# Altium PCB PCB1.PcbDoc
Units mm, origin at the board's own origin, x right, y up, seen from the top; angles counter-clockwise.
Board outline 75.06 x 51.94 mm, 2 copper layers (Top Layer, Bottom Layer); 23 components, 26 nets, 108 pads, 0 vias.
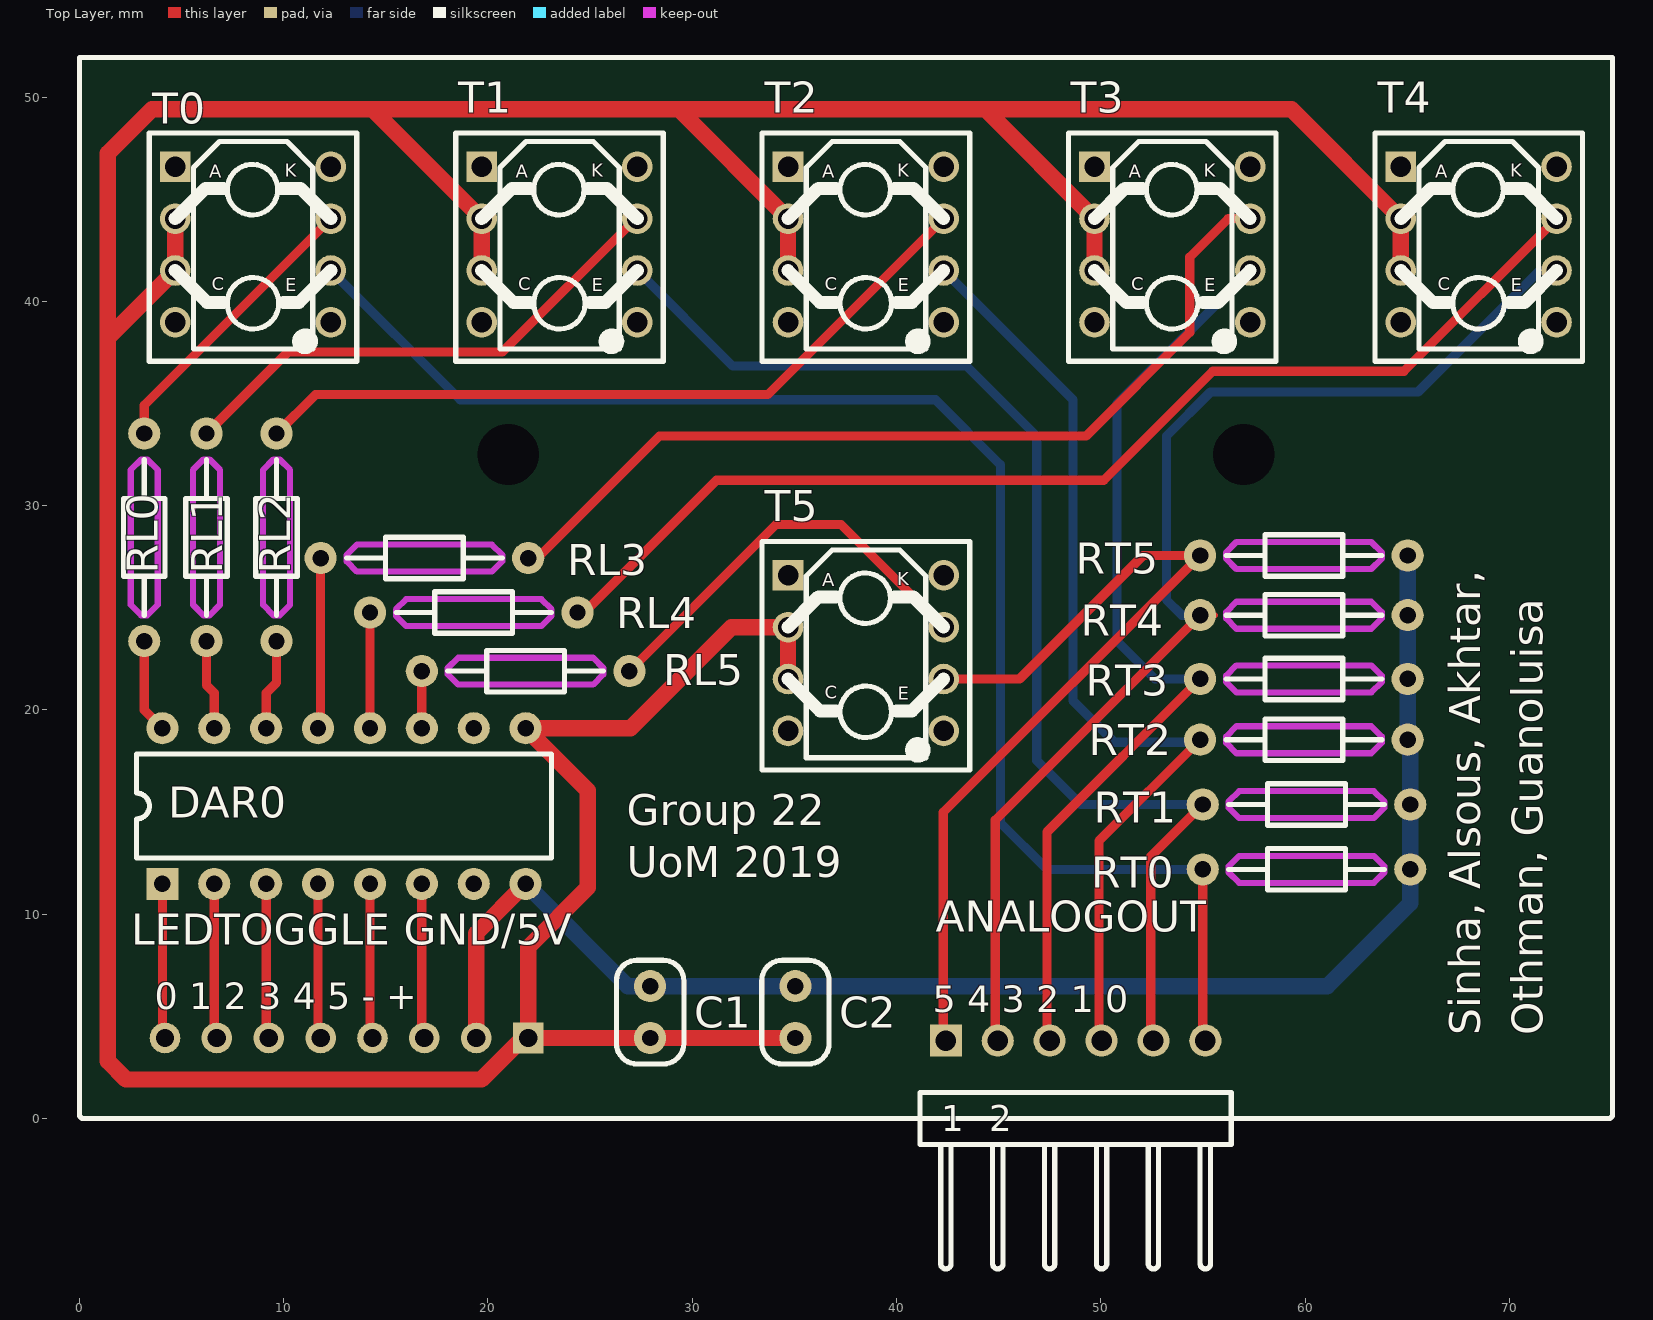
[diagram p0: Top Layer view]
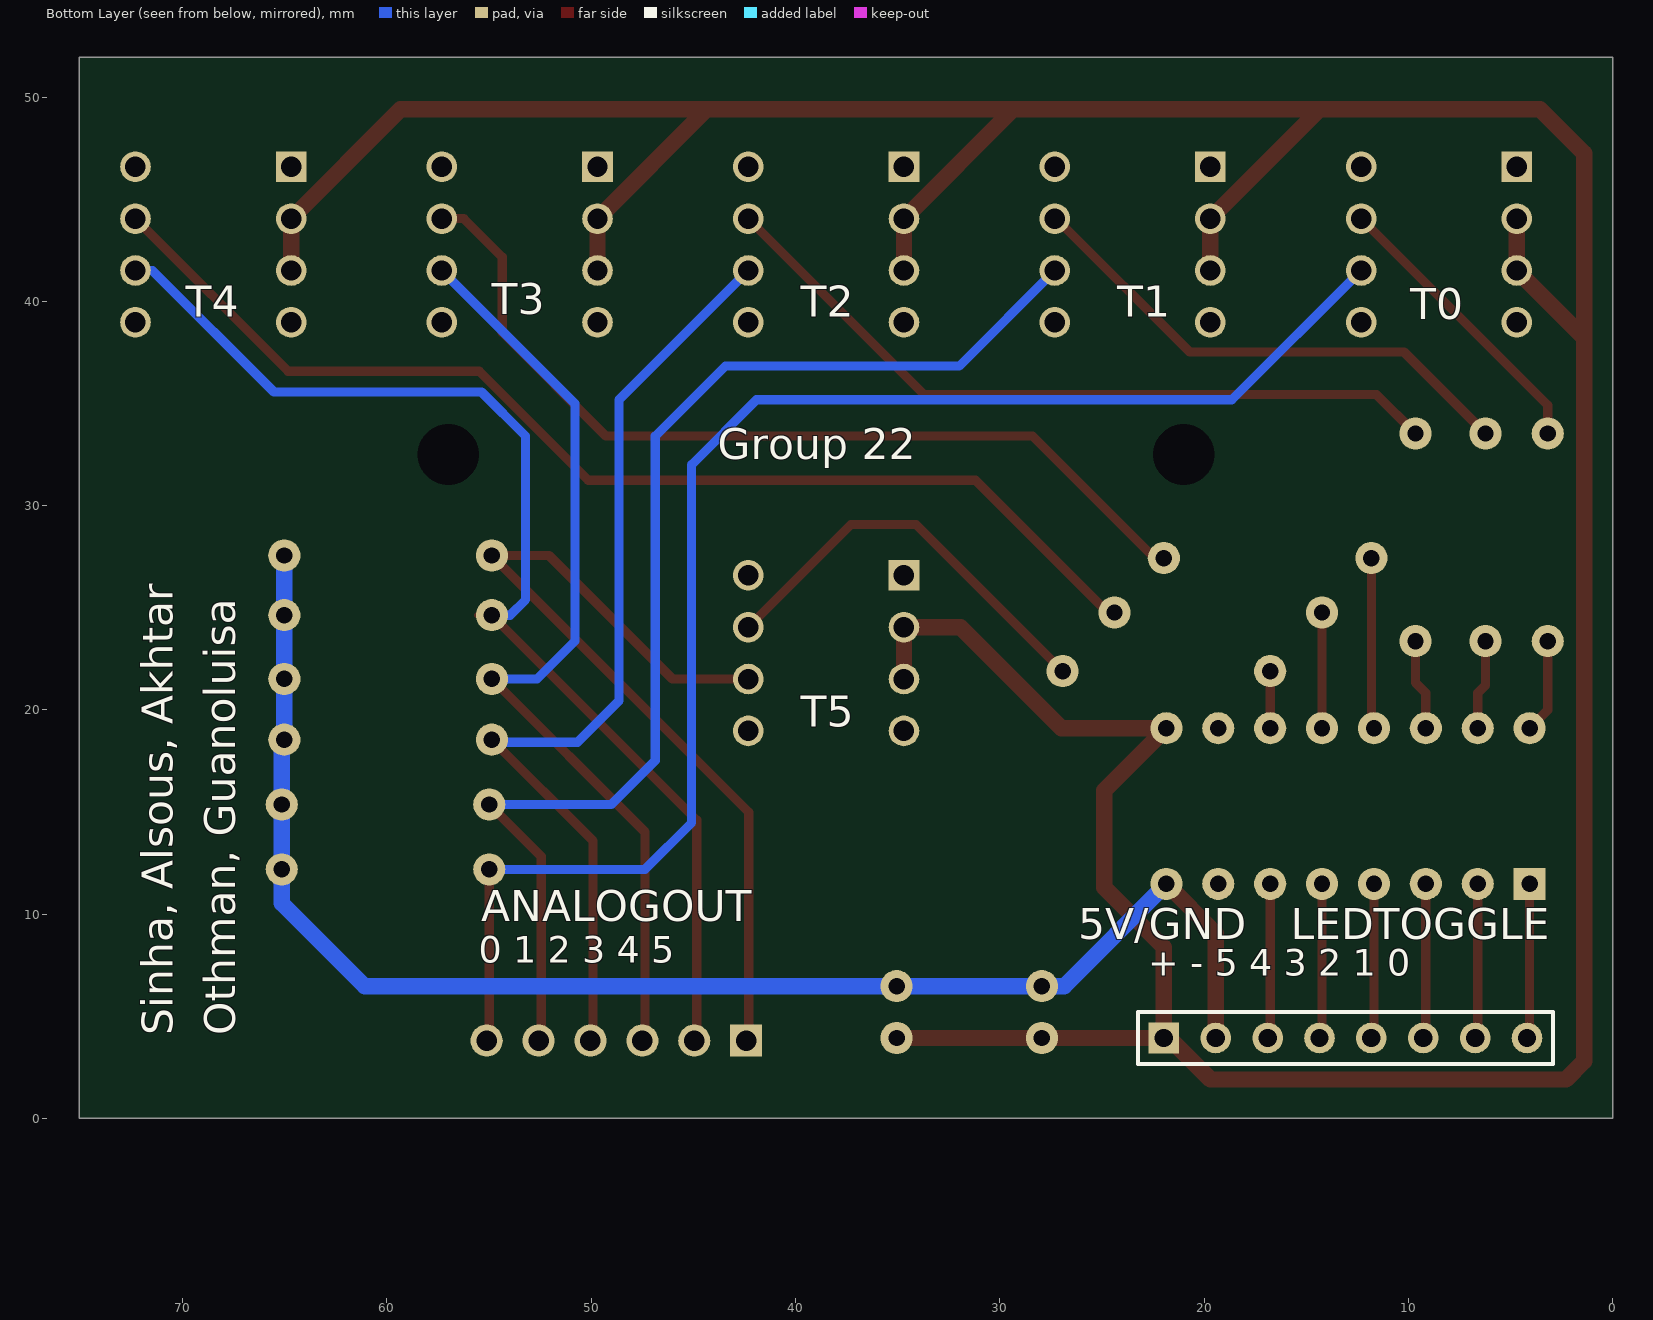
[diagram p1: Bottom Layer view, seen from below]
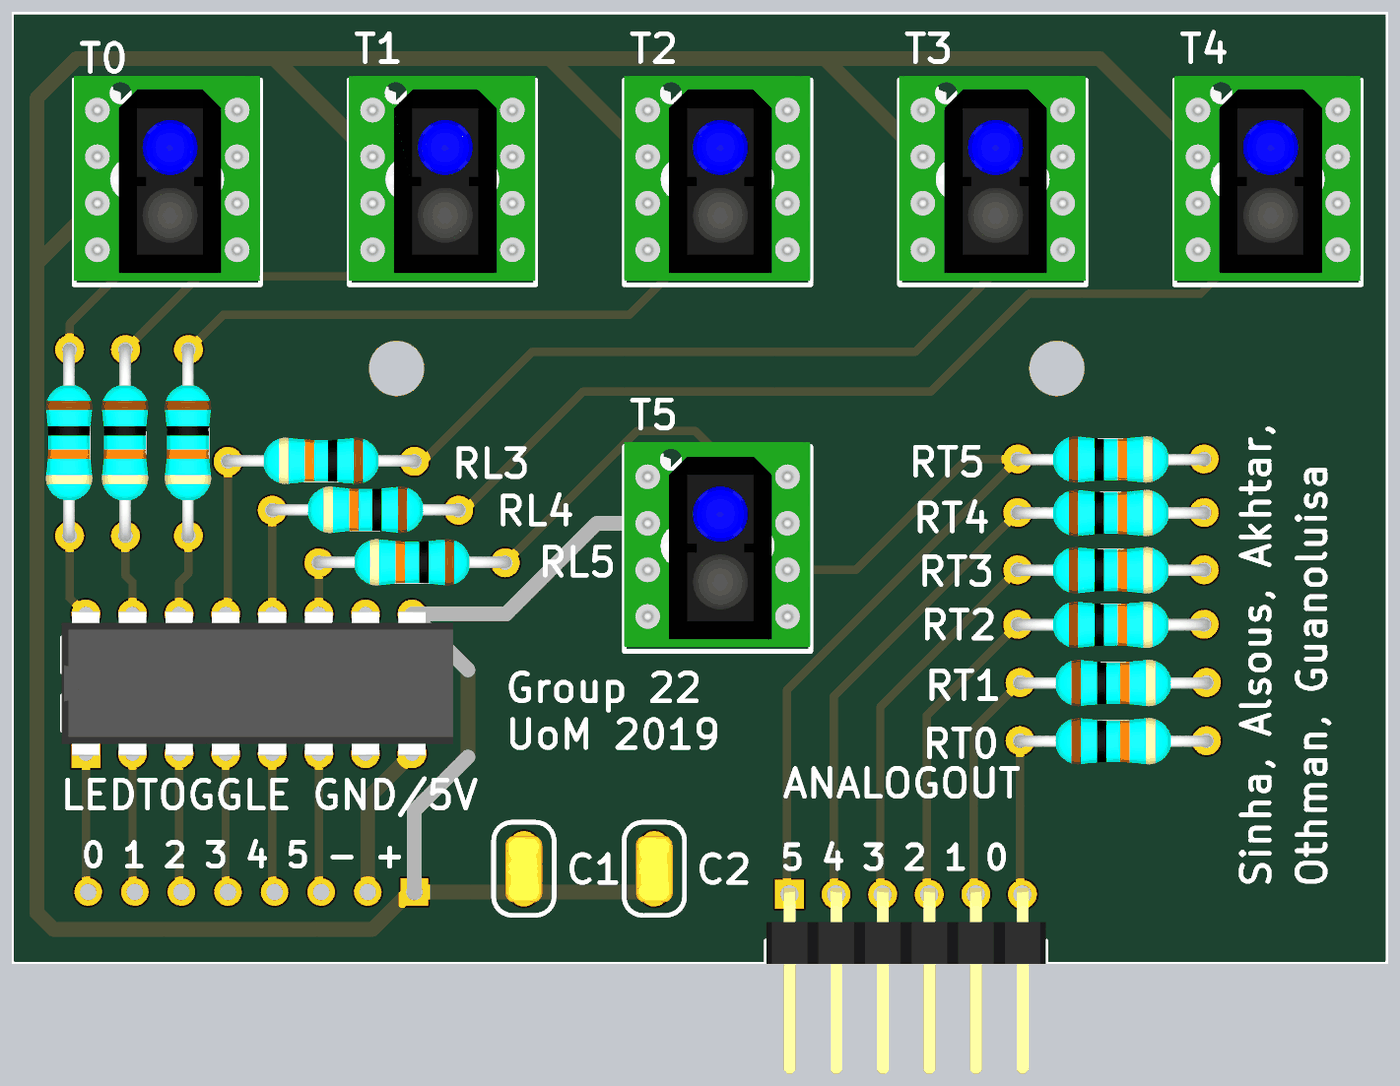
[diagram p2: 3D render of the assembled board from above, using the file's embedded part models]

## Layer stack, top to bottom
Top Solder: solder mask 0.0102, Solder Resist, Dk 3.5
Top Layer: signal copper 0.0356
Dielectric 1: dielectric 0.32, FR-4, Dk 4.8
Bottom Layer: signal copper 0.0356
Bottom Solder: solder mask 0.0102, Solder Resist, Dk 3.5

## Board outline
0,0 75.057,0 75.057,51.943 0,51.943

## Design rules (kind name [scope] priority, off if disabled: settings)
Clearance [All] p1: gap=0.254 ignorepadtopadclearanceinfootprint=FALSE except(0: Arc-Hole Track-Hole SMDPad-Hole THPad-Hole Via-Hole Fill-Hole Poly-Hole Region-Hole Text-Hole)
PolygonConnect [All] p1: connectstyle=Relief reliefconductorwidth=0.254 reliefentries=4 polygonreliefangle="90 Angle" airgapwidth=0.254
RoutingVias [All] p1: holewidth=0.711 width=1.27 viastyle="Through Hole" minholewidth=0.711 minwidth=1.27 maxholewidth=0.711 maxwidth=1.27
SolderMaskExpansion [All] p1: expansion=0.102
Width [All] p1: maxlimit=0.8 minlimit=0.254 preferedwidth=0.3 minimp=50.000000 maximp=50.000000 favimp=50.000000
30 further rules are at their usual default settings.

## Components (designator, comment, footprint, x,y, rotation, side; value= is the part's Value field where it differs from the comment)
ANALOGOUT "Debug Interface" PROGRAMMING-HEADER-MICRO 42.418,3.81 r0 top
C1 "100nF" CAPACITOR_100NF_TH 27.94,3.937 r90 top
C2 "100nF" CAPACITOR_100NF_TH 35.052,3.937 r90 top
DAR0 "ULN2003" "DILP-16(300) - 3D" 4.064,11.484 r90 top
LEDTOGGLE "Debug Interface" HDR1X8 21.971,3.937 r180 bottom
RL0 "Resistor (IO board)" RESISTOR_10K_TH_QW 3.175,23.368 r90 top
RL1 "Resistor (IO board)" RESISTOR_10K_TH_QW 6.223,23.368 r90 top
RL2 "Resistor (IO board)" RESISTOR_10K_TH_QW 9.652,23.368 r90 top
RL3 "Resistor (IO board)" RESISTOR_10K_TH_QW 11.811,27.432 r0 top
RL4 "Resistor (IO board)" RESISTOR_10K_TH_QW 14.224,24.765 r0 top
RL5 "Resistor (IO board)" RESISTOR_10K_TH_QW 16.764,21.898 r0 top
RT0 "Resistor (IO board)" RESISTOR_10K_TH_QW 65.151,12.192 r180 top
RT1 "Resistor (IO board)" RESISTOR_10K_TH_QW 65.151,15.367 r180 top
RT2 "Resistor (IO board)" RESISTOR_10K_TH_QW 65.024,18.542 r180 top
RT3 "Resistor (IO board)" RESISTOR_10K_TH_QW 65.024,21.517 r180 top
RT4 "Resistor (IO board)" RESISTOR_10K_TH_QW 65.024,24.638 r180 top
RT5 "Resistor (IO board)" RESISTOR_10K_TH_QW 65.024,27.559 r180 top
T0 "TCRT5000(On PCB)" "TCRT5000 Breakout" 6.491,44.706 r0 top
T1 "TCRT5000(On PCB)" "TCRT5000 Breakout" 21.491,44.706 r0 top
T2 "TCRT5000(On PCB)" "TCRT5000 Breakout" 36.491,44.706 r0 top
T3 "TCRT5000(On PCB)" "TCRT5000 Breakout" 51.491,44.706 r0 top
T4 "TCRT5000(On PCB)" "TCRT5000 Breakout" 66.491,44.706 r0 top
T5 "TCRT5000(On PCB)" "TCRT5000 Breakout" 36.491,24.706 r0 top

## Footprints (in the part's own frame and the unit in brackets; to place one, negate y for a bottom-side part, rotate by r counter-clockwise, add the part's x,y. Pads: shape width x height; smd on the part's side, far side on the other; paste and mask are expansions set on the pad)
CAPACITOR_100NF_TH [mil]
  round 62 hole 31.5: 1(0,0) 2(100,0)
  silkscreen extent -50,-65 150,65, body extent -22,-39 121,39, height 174
"DILP-16(300) - 3D" [mil]
  rect 62x62 hole 31.5: 1(0,0)
  round 62 hole 31.5: 2(0,-100) 3(0,-200) 4(0,-300) 5(0,-400) 6(0,-500) 7(0,-600) 8(0,-700) 9(300,-700) 10(300,-600) 11(300,-500) 12(300,-400) 13(300,-300) 14(300,-200) 15(300,-100) 16(300,0)
  silkscreen extent 50,-750 250,50, body extent -4,-789 306,53, height 200
HDR1X8 [mm] "Connector; Header; 8 Position"
  rect 1.5x1.5 hole 0.9: 1(0,0)
  round 1.5 hole 0.9: 2(2.54,0) 3(5.08,0) 4(7.62,0) 5(10.16,0) 6(12.7,0) 7(15.24,0) 8(17.78,0)
  silkscreen extent -1.27,-1.27 19.05,1.27
PROGRAMMING-HEADER-MICRO [mil]
  rect 62x62 hole 39.37: 1(0,0)
  round 62 hole 39.37: 2(100,0) 3(200,0) 4(300,0) 5(400,0) 6(500,0)
  silkscreen extent -50,-440 550,-100, body extent -50,-385 550,13, height 99
RESISTOR_10K_TH_QW [mil]
  round 62 hole 31.5: 1(0,0) 2(400,0)
  Top Layer keep-out lines w12: 70,26 50,6 50,-6 70,-26 330,-26 350,-6 350,6 330,26 70,26
  silkscreen extent 50,-40 350,40, body extent -12,-49 412,51, height 103
"TCRT5000 Breakout" [mm]
  rect 1.5x1.5 hole 1: 1(-1.799,1.884)
  round 1.5 hole 1: 2(-1.799,-0.656) 3(-1.799,-3.196) 4(-1.799,-5.736) 5(5.821,-5.736) 6(5.821,-3.196) 7(5.821,-0.656) 8(5.821,1.884)
  silkscreen extent -3.07,-7.64 7.09,3.54, body extent -3.09,-7.41 7.09,3.77, height 10.11

## Part data
ANALOGOUT: library part "Header 6", "Header, 6-Pin", LatestRevisionDate=17-Jul-2002, LatestRevisionNote="Re-released for DXP Platform.", Publisher="Altium Limited"
C1 C2: library part "Capacitor(IO Board)", "Capacitor 100nF"
DAR0: "Darlington Transistor Array", Supplier Part Number 1=1470512, Supplier 1=Farnell
LEDTOGGLE: library part "Header 8", "Header, 8-Pin", LatestRevisionDate=17-Jul-2002, LatestRevisionNote="Re-released for DXP Platform.", Publisher="Altium Limited"
RL0 RL1 RL2 RL3 RL4 RL5 RT0 RT1 RT2 RT3 RT4 RT5: library part "Resistor(IO board)", "Resistor (SFR25)"
  RL0 RL1 RL2 RL3 RL4 RL5: =100
  RT0 RT1 RT2 RT3 RT4 RT5: =10k
T0 T1 T2 T3 T4 T5: "4-Pin Phototransistor Optocoupler", Supplier Part Number 1=1470066, DatasheetVersion=Nov-2003, LatestRevisionDate=04-Mar-2005, LatestRevisionNote="Sch pins 3 & 4 Swapped.", PackageReference=DIP-4, Published=24-Mar-1999, Publisher="Altium Limited", Supplier 1=Farnell

## Free pads (board coordinates)
  round 1.524 hole 3: 1(21,32.5) 2(57,32.5)

## Nets (pads, with @x,y where several pads share a name; then routed paths per layer and width w, separated by ;. In a path a pad name is that pad's centre, name@x,y a point inside that pad or via, vN(x,y) a via of type N, cw(c..) or ccw(c..) an arc to the next point about the centre after c; other vN are vias at no path point)
NetANALOGOUT_1: ANALOGOUT.1 RT5.2 T5.6 | length 44
  Top Layer w0.45: ANALOGOUT.1@42.291,3.81 42.291,14.986 RT5.2 52.07,27.559 46.021,21.51 T5.6
NetANALOGOUT_2: ANALOGOUT.2 RT4.2 T4.6 | length 58.1
  Top Layer w0.254: RT4.2 RT4.2@55.601,24.638
  Top Layer w0.45: ANALOGOUT.2@44.831,3.81 44.831,14.605 RT4.2
  Bottom Layer w0.45: RT4.2 53.975,24.638 53.213,25.4 53.213,33.401 55.372,35.56 65.532,35.56 71.482,41.51 T4.6
NetANALOGOUT_3: ANALOGOUT.3 RT3.2 T3.6 | length 46.5
  Top Layer w0.45: ANALOGOUT.3@47.371,3.81 47.371,14.024 RT3.2
  Bottom Layer w0.45: RT3.2 52.651,21.517 50.8,23.368 50.8,34.998 T3.6
NetANALOGOUT_4: ANALOGOUT.4 RT2.2 T2.6 | length 47.6
  Top Layer w0.45: ANALOGOUT.4@49.911,3.81 49.911,13.589 RT2.2
  Bottom Layer w0.45: T2.6 48.641,35.181 48.641,20.447 50.673,18.415 54.737,18.415 RT2.2
NetANALOGOUT_5: ANALOGOUT.5 RT1.2 T1.6 | length 60.4
  Top Layer w0.45: ANALOGOUT.5@52.451,3.81 52.451,12.827 RT1.2
  Bottom Layer w0.45: T1.6 31.992,36.83 43.434,36.83 46.863,33.401 46.863,17.526 49.022,15.367 RT1.2
NetANALOGOUT_6: ANALOGOUT.6 RT0.2 T0.6 | length 73.5
  Top Layer w0.45: ANALOGOUT.6@54.991,3.81 RT0.2
  Bottom Layer w0.45: T0.6 18.643,35.179 41.91,35.179 45.085,32.004 45.085,14.478 47.371,12.192 RT0.2
NetC1_1: C1.1 C2.1 DAR0.9 LEDTOGGLE.1 T0.2 T0.3 T1.2 T1.3 T2.2 T2.3 T3.2 T3.3 T4.2 T4.3 T5.2 T5.3 | length 221
  Top Layer w0.8: T0.2 T0.3 1.397,38.215 ; T1.3@19.692,41.456 T1.3 T1.2 14.339,49.403 ; T5.3 T5.2 31.924,24.05 26.978,19.104 DAR0.9 24.892,16.056 24.892,11.303 21.971,8.382 LEDTOGGLE.1 ; T2.3 T2.2 29.339,49.403 ; C2.1 C1.1 LEDTOGGLE.1 ; T3.3 T3.2 44.339,49.403 ; T4.3 T4.2 59.339,49.403 44.339,49.403 ; 1.397,38.215 1.397,47.244 3.556,49.403 14.339,49.403 ; 1.397,38.215 1.397,2.794 2.286,1.905 19.685,1.905 21.844,4.064 LEDTOGGLE.1 ; 14.339,49.403 29.339,49.403 ; 29.339,49.403 44.339,49.403
NetC1_2: C1.2 C2.2 DAR0.8 LEDTOGGLE.2 RT0.1 RT1.1 RT2.1 RT3.1 RT4.1 RT5.1 | length 72.7
  Top Layer w0.8: LEDTOGGLE.2 19.431,9.071 DAR0.8
  Bottom Layer w0.8: DAR0.8 26.851,6.477 C1.2 C2.2 61.087,6.477 65.151,10.541 RT0.1 RT1.1 65.151,18.415 RT2.1 RT3.1 RT4.1 RT5.1
NetDAR0_1: DAR0.1 LEDTOGGLE.8 | length 7.6
  Top Layer w0.254: LEDTOGGLE.8@4.064,4.064 LEDTOGGLE.8
  Top Layer w0.45: LEDTOGGLE.8@4.064,4.064 DAR0.1
NetDAR0_2: DAR0.2 LEDTOGGLE.7 | length 7.6
  Top Layer w0.254: LEDTOGGLE.7@6.604,4.064 LEDTOGGLE.7
  Top Layer w0.45: LEDTOGGLE.7@6.604,4.064 DAR0.2
NetDAR0_3: DAR0.3 LEDTOGGLE.6 | length 7.6
  Top Layer w0.254: LEDTOGGLE.6@9.144,4.064 LEDTOGGLE.6
  Top Layer w0.45: LEDTOGGLE.6@9.144,4.064 DAR0.3
NetDAR0_4: DAR0.4 LEDTOGGLE.5 | length 7.6
  Top Layer w0.254: LEDTOGGLE.5@11.684,4.064 LEDTOGGLE.5
  Top Layer w0.45: LEDTOGGLE.5@11.684,4.064 DAR0.4
NetDAR0_5: DAR0.5 LEDTOGGLE.4 | length 7.6
  Top Layer w0.254: LEDTOGGLE.4@14.224,4.064 LEDTOGGLE.4
  Top Layer w0.45: LEDTOGGLE.4@14.224,4.064 DAR0.5
NetDAR0_6: DAR0.6 LEDTOGGLE.3 | length 7.6
  Top Layer w0.254: LEDTOGGLE.3@16.764,4.064 LEDTOGGLE.3
  Top Layer w0.45: LEDTOGGLE.3@16.764,4.064 DAR0.6
NetDAR0_11: DAR0.11 RL5.1 | length 2.8
  Top Layer w0.45: DAR0.11 RL5.1
NetDAR0_12: DAR0.12 RL4.1 | length 5.7
  Top Layer w0.45: DAR0.12 RL4.1
NetDAR0_13: DAR0.13 RL3.1 | length 8.4
  Top Layer w0.3: DAR0.13 DAR0.13@11.811,19.231
  Top Layer w0.45: DAR0.13@11.811,19.231 RL3.1
NetDAR0_14: DAR0.14 RL2.1 | length 5
  Top Layer w0.45: DAR0.14@9.525,19.485 DAR0.14 9.144,20.828 9.652,21.336 RL2.1
NetDAR0_15: DAR0.15 RL1.1 | length 4.4
  Top Layer w0.45: RL1.1 6.223,21.209 6.604,20.828 DAR0.15
NetDAR0_16: DAR0.16 RL0.1 | length 4.6
  Top Layer w0.45: RL0.1 3.175,19.993 DAR0.16
NetRL0_2: RL0.2 T0.7 | length 14.3
  Top Layer w0.45: RL0.2 3.175,34.913 T0.7
NetRL1_2: RL1.2 T1.7 | length 25.4
  Top Layer w0.45: RL1.2 10.214,37.519 20.701,37.519 27.232,44.05 T1.7
NetRL2_2: RL2.2 T2.7 | length 37
  Top Layer w0.45: RL2.2 11.557,35.433 33.695,35.433 T2.7
NetRL3_2: RL3.2 T3.7 | length 44.6
  Top Layer w0.45: RL3.2@21.971,26.978 28.394,33.401 49.276,33.401 54.356,38.481 54.356,42.164 56.242,44.05 T3.7
NetRL4_2: RL4.2 T4.7 | length 56.1
  Top Layer w0.45: RL4.2@24.384,24.438 31.188,31.242 50.145,31.242 55.479,36.576 64.838,36.576 T4.7
NetRL5_2: RL5.2 T5.7 | length 20.4
  Top Layer w0.45: RL5.2 34.109,29.083 37.279,29.083 T5.7
pads on no net: DAR0.7 DAR0.10 T0.1 T0.4 T0.5 T0.8 T1.1 T1.4 T1.5 T1.8 T2.1 T2.4 T2.5 T2.8 T3.1 T3.4 T3.5 T3.8 T4.1 T4.4 T4.5 T4.8 T5.1 T5.4 T5.5 T5.8

## Silkscreen, mask and mechanical layers (free items; w line width, h text height)
Top Overlay:
  lines w0.254: 0,0.127 0,51.943 75.057,51.943 75.057,0.127 74.93,0 0.127,0 0,0.127
  text "Group 22" at 26.797,14.351 h1.52
  text "UoM 2019" at 26.797,11.811 h1.52
  text "LEDTOGGLE GND/5V" at 2.54,8.509 h1.52
  text "0 1 2 3 4 5 - +" at 3.683,5.334 h1.3
  text "5 4 3 2 1 0" at 41.783,5.207 h1.3
  text "Sinha, Alsous, Akhtar," at 68.58,4.064 h1.52 r90
  text "Othman, Guanoluisa" at 71.628,4.064 h1.52 r90
Bottom Overlay:
  text "T3" at 54.864,39.37 h1.52
  text "T1" at 24.257,39.243 h1.52
  text "T2" at 39.751,39.243 h1.52
  text "T4" at 69.85,39.243 h1.52
  text "T0" at 9.906,39.116 h1.52
  text "Group 22" at 43.815,32.258 h1.52
  text "T5" at 39.751,19.177 h1.52
  text "ANALOGOUT" at 55.372,9.652 h1.52
  text "5V/GND" at 26.162,8.763 h1.52
  text "0 1 2 3 4 5" at 55.499,7.62 h1.3
  text "+ - 5 4 3 2 1 0" at 22.733,6.985 h1.3
  text "Othman, Guanoluisa" at 67.437,4.064 h1.52 r270
  text "Sinha, Alsous, Akhtar" at 70.485,4.064 h1.52 r270

## Text inside footprints (layer, text, board x,y; h text height)
ANALOGOUT: Top Overlay "1" at 42.189,-0.635 h1.27; Top Overlay "2" at 44.552,-0.635 h1.27
T0: Top Overlay "A" at 6.364,46.052 h0.64; Top Overlay "K" at 10.047,46.103 h0.64; Top Overlay "C" at 6.491,40.54 h0.64; Top Overlay "E" at 10.072,40.49 h0.64
T1: Top Overlay "A" at 21.364,46.052 h0.64; Top Overlay "K" at 25.047,46.103 h0.64; Top Overlay "C" at 21.491,40.54 h0.64; Top Overlay "E" at 25.072,40.49 h0.64
T2: Top Overlay "A" at 36.364,46.052 h0.64; Top Overlay "K" at 40.047,46.103 h0.64; Top Overlay "C" at 36.491,40.54 h0.64; Top Overlay "E" at 40.072,40.49 h0.64
T3: Top Overlay "A" at 51.364,46.052 h0.64; Top Overlay "K" at 55.047,46.103 h0.64; Top Overlay "C" at 51.491,40.54 h0.64; Top Overlay "E" at 55.072,40.49 h0.64
T4: Top Overlay "A" at 66.364,46.052 h0.64; Top Overlay "K" at 70.047,46.103 h0.64; Top Overlay "C" at 66.491,40.54 h0.64; Top Overlay "E" at 70.072,40.49 h0.64
T5: Top Overlay "A" at 36.364,26.052 h0.64; Top Overlay "K" at 40.047,26.103 h0.64; Top Overlay "C" at 36.491,20.54 h0.64; Top Overlay "E" at 40.072,20.49 h0.64